# Altium PCB PCB1.PcbDoc
Units mil, origin at the board's own origin, x right, y up, seen from the top; angles counter-clockwise.
Board outline 2615 x 1935 mil, 2 copper layers (Top Layer, Bottom Layer); 43 components, 30 nets, 112 pads, 3 vias.
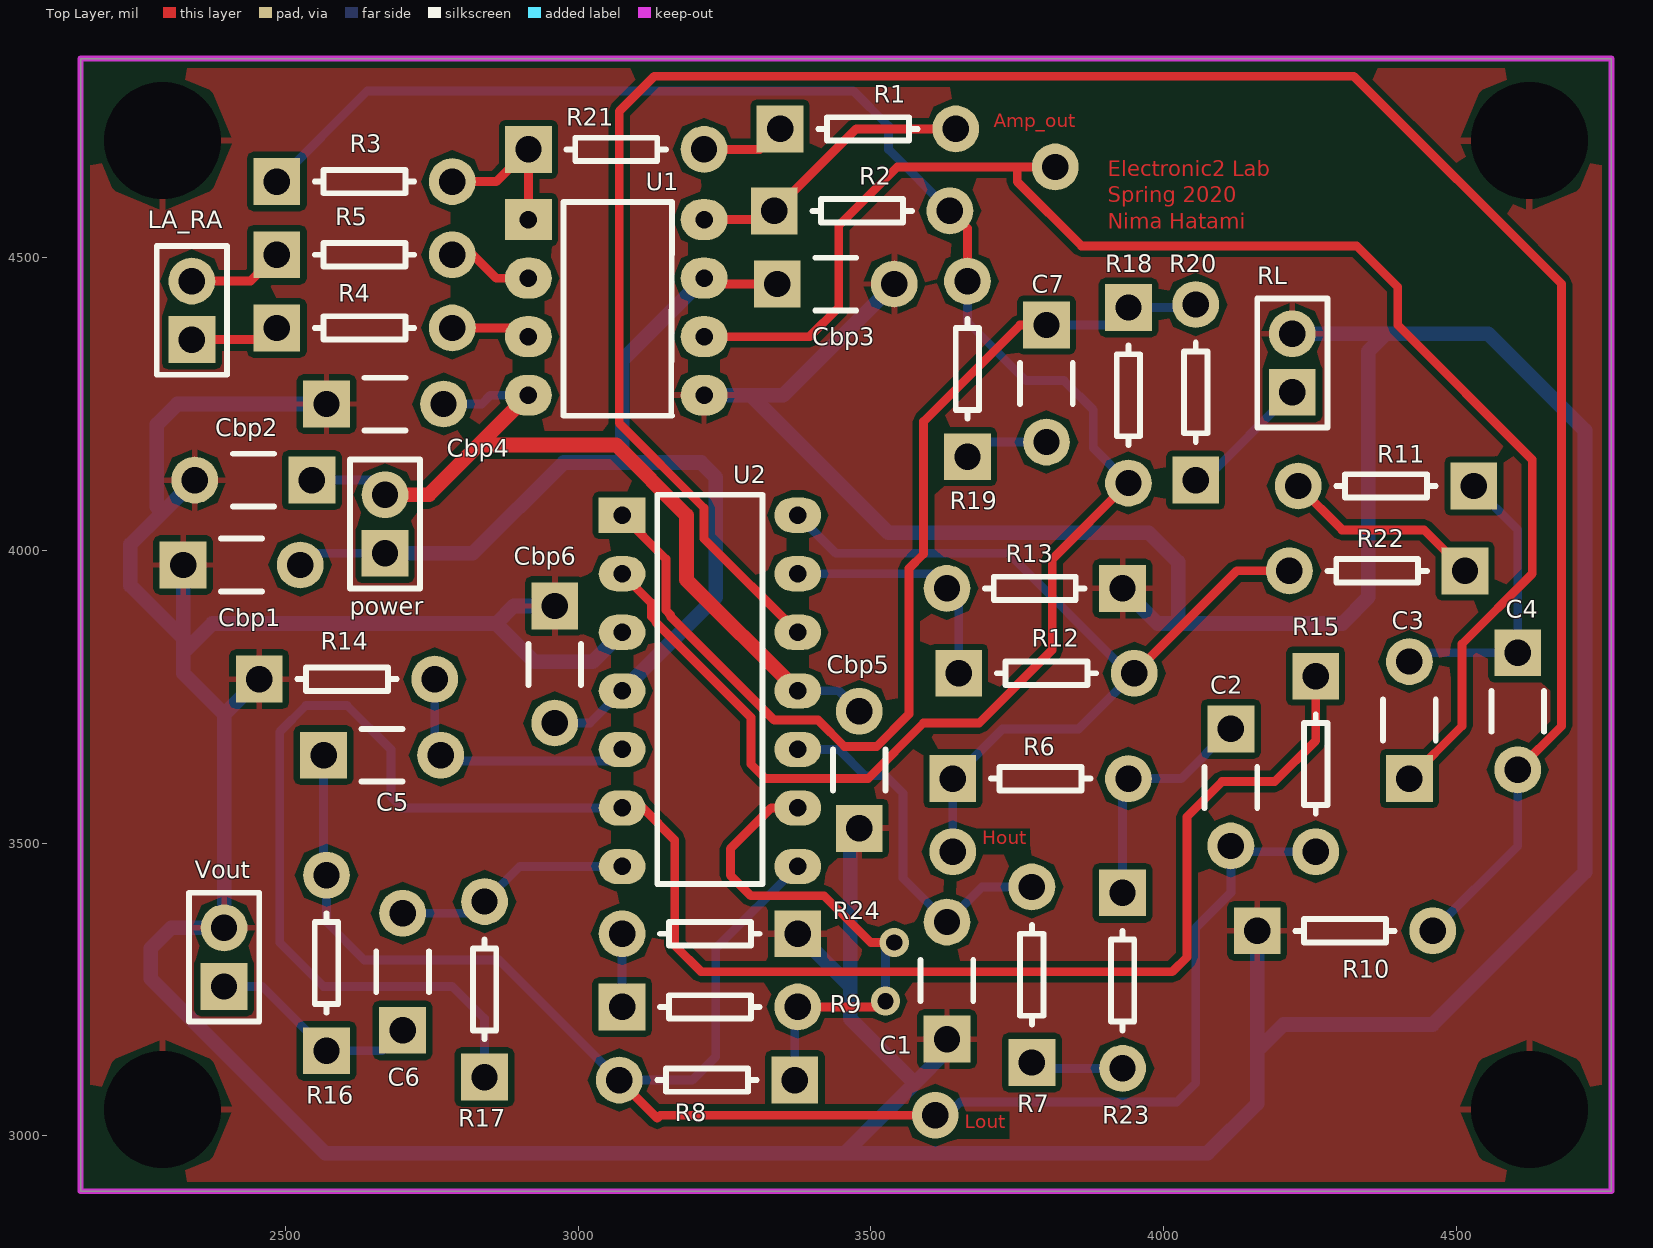
[diagram p0: Top Layer view]
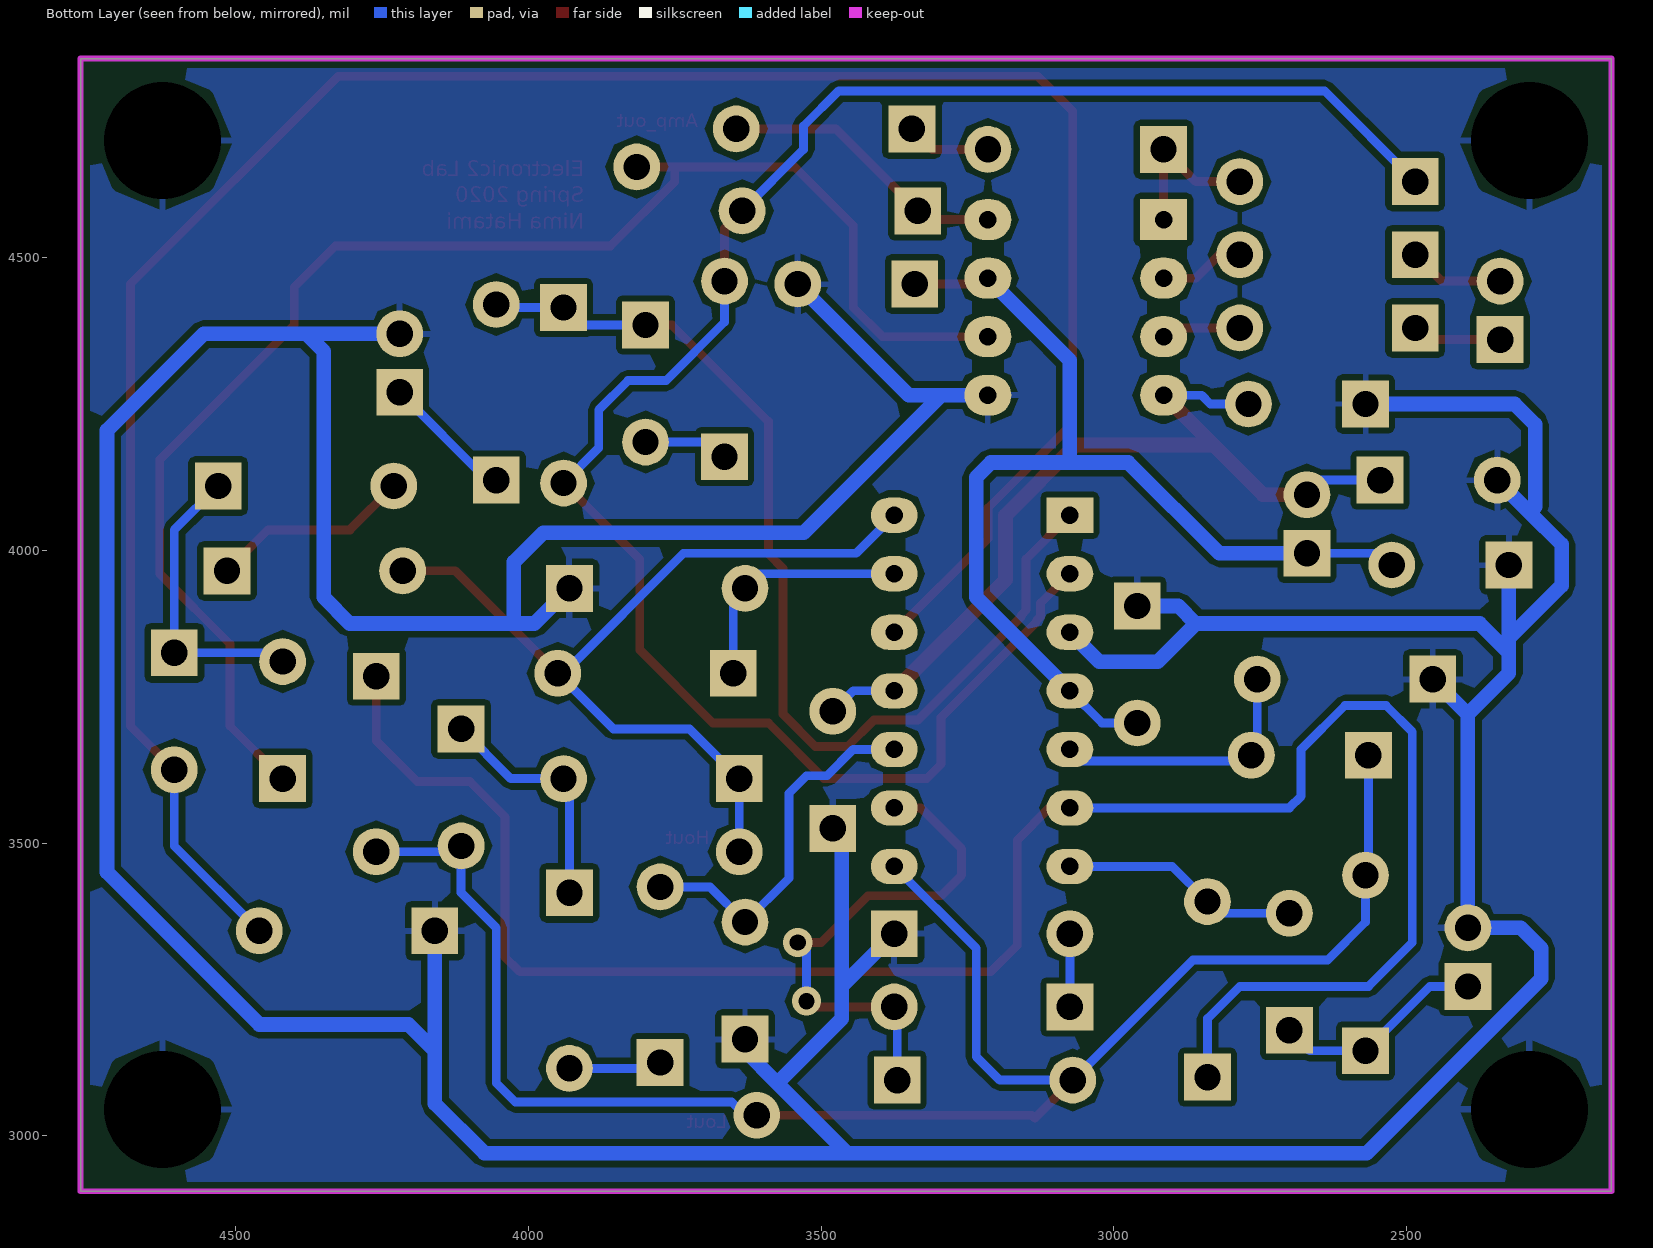
[diagram p1: Bottom Layer view, seen from below]

## Layer stack, top to bottom
Top Solder: solder mask 0.4, Solder Resist, Dk 3.5
Top Layer: signal copper 1.4
Dielectric 1: dielectric 12.6, FR-4, Dk 4.8
Bottom Layer: signal copper 1.4
Bottom Solder: solder mask 0.4, Solder Resist, Dk 3.5

## Board outline
2150,2905 2150,4840 4765,4840 4765,2905

## Design rules (kind name [scope] priority, off if disabled: settings)
Clearance [All] p1: gap=10 ignorepadtopadclearanceinfootprint=FALSE except(0: Arc-Hole Track-Hole SMDPad-Hole THPad-Hole Via-Hole Fill-Hole Poly-Hole Region-Hole Text-Hole)
HoleSize [All] p1: absolutevalues=TRUE maxlimit=250 minlimit=1 maxpercent=80.000 minpercent=20.000
PolygonConnect [All] p1: connectstyle=Relief reliefconductorwidth=10 reliefentries=4 polygonreliefangle="90 Angle" airgapwidth=10
RoutingVias [All] p1: holewidth=28 width=50 viastyle="Through Hole" minholewidth=28 minwidth=50 maxholewidth=28 maxwidth=50
SolderMaskExpansion [All] p1: expansion=4 istentingtop=FALSE
Width [All] p1: maxlimit=60 minlimit=10 preferedwidth=10
29 further rules are at their usual default settings.

## Components (designator, comment, footprint, x,y, rotation, side; value= is the part's Value field where it differs from the comment)
C1 "Cap" cap 3630,3165 r90 top value=15nF
C2 "Cap" cap 4115,3695 r270 top value=2.2uF
C3 "Cap" cap 4420,3610 r90 top value=2.2uF
C4 "Cap" cap 4605,3825 r270 top value=6.8uF
C5 "Cap" cap 2565,3650 r0 top value=47nF
C6 "Cap" cap 2700,3180 r90 top value=47nF
C7 "Cap" cap 3800,4385 r270 top value=100nF
Cbp1 "Cap" cap 2325,3975 r0 top value=10uF
Cbp2 "Cap" cap 2545,4120 r180 top value=10uF
Cbp3 "Cap" cap 3340,4455 r0 top value=100nF
Cbp4 "Cap" cap 2570,4250 r0 top value=100nF
Cbp5 "Cap" cap 3480,3525 r90 top value=100nF
Cbp6 "Cap" cap 2960,3905 r270 top value=100nF
LA_RA "port" pinheader 2340,4360 r90 top
power "port" pinheader 2670,3995 r90 top
R1 "Res Semi" res 3345,4720 r0 top value=12k
R2 "Res Semi" res 3335,4580 r0 top value=22k
R3 "Res Semi" res 2485,4630 r0 top value=22k
R4 "Res Semi" res 2485,4380 r0 top value=220k
R5 "Res Semi" res 2485,4505 r0 top value=220k
R6 "Res Semi" res 3640,3610 r0 top value=180k
R7 "Res Semi" res 3775,3125 r90 top value=220k
R8 "Res Semi" res 3370,3095 r180 top value=270k
R9 "Res Semi" res 3075,3220 r0 top value=22k
R10 "Res Semi" res 4160,3350 r0 top value=1.8Meg
R11 "Res Semi" res 4530,4110 r180 top value=4.7Meg
R12 "Res Semi" res 3650,3790 r0 top value=100k
R13 "Res Semi" res 3930,3935 r180 top value=10k
R14 "Res Semi" res 2455,3780 r0 top value=68k
R15 "Res Semi" res 4260,3785 r270 top value=10k
R16 "Res Semi" res 2570,3145 r90 top value=68k
R17 "Res Semi" res 2840,3100 r90 top value=10k
R18 "Res Semi" res 3940,4415 r270 top value=1Meg
R19 "Res Semi" res 3665,4160 r90 top value=10k
R20 "Res Semi" res 4055,4120 r90 top value=220k
R21 "Res Semi" res 2915,4685 r0 top value=2.7k
R22 "Res Semi" res 4515,3965 r180 top value=680k
R23 "Res Semi" res 3930,3415 r270 top value=10k
R24 "Res Semi" res 3375,3345 r180 top value=33
RL "port" pinheader 4220,4270 r90 top
U1 "AD620" AD620 2915,4565 r0 top
U2 "TL084" TL084 3075,4060 r0 top
Vout "port" pinheader 2395,3255 r90 top

## Footprints (in the part's own frame and the unit in brackets; to place one, negate y for a bottom-side part, rotate by r counter-clockwise, add the part's x,y. Pads: shape width x height; smd on the part's side, far side on the other; paste and mask are expansions set on the pad)
AD620 [mil]
  rect 80x70 hole 30: 1(0,0)
  oval 80x70 hole 30: 2(0,-100) 3(0,-200) 4(0,-300) 5(300,-300) 6(300,-200) 7(300,-100) 8(300,0)
  round 30 on Top Overlay: 9(90,5)
  silkscreen extent 60,-335 245,30
cap [mil]
  rect 80x80 hole 45: 1(0,0)
  round 80 hole 45: 2(200,0)
  silkscreen extent 65,-45 135,45
pinheader [mil]
  rect 80x80 hole 45: 1(0,0)
  round 80 hole 45: 2(100,0)
  silkscreen extent -60,-60 160,60
res [mil]
  rect 80x80 hole 45: 1(0,0)
  round 80 hole 45: 2(300,0)
  silkscreen extent 65,-20 235,20
TL084 [mil]
  rect 80x60 hole 30: 1(0,0)
  oval 80x60 hole 30: 2(0,-100) 3(0,-200) 4(0,-300) 5(0,-400) 6(0,-500) 7(0,-600) 8(300,-600) 9(300,-500) 10(300,-400) 11(300,-300) 12(300,-200) 13(300,-100) 14(300,0)
  round 30 on Top Overlay: 15(95,0)
  silkscreen extent 60,-630 240,35

## Part data
C1 C2 C3 C4 C5 C6 C7 Cbp1 Cbp2 Cbp3 Cbp4 Cbp5 Cbp6: "Capacitor", LatestRevisionDate=17-Jul-2002, LatestRevisionNote="Re-released for DXP Platform.", PackageDescription="Radial Cap, Thru-Hole; 2 Leads; 0.3 in Pin Spacing", PackageReference=RAD-0.3, Published=8-Jun-2000, Publisher="Altium Limited"
R1 R2 R3 R4 R5 R6 R7 R8 R9 R10 R11 R12 R13 R14 R15 R16 R17 R18 R19 R20 R21 R22 R23 R24: "Semiconductor Resistor", LatestRevisionDate=17-Jul-2002, LatestRevisionNote="Re-released for DXP Platform.", PackageDescription="Axial Device, Thru-Hole; 2 Leads; 0.5 in Pin Spacing", PackageReference=AXIAL-0.5, Published=8-Jun-2000, Publisher="Altium Limited"

## Free pads (board coordinates)
  round 80 hole 45: 5(3640,3485) 6(3815,4655)
  round 80 hole 200: 7(2290,4700) 8(2290,3045) 9(4625,3045) 10(4625,4700)

## Via types
v1: diameter 50, hole 28, Top Layer to Bottom Layer, 2 vias
v2: diameter 80, hole 45, Top Layer to Bottom Layer, 1 vias

## Nets (pads, with @x,y where several pads share a name; then routed paths per layer and width w, separated by ;. In a path a pad name is that pad's centre, name@x,y a point inside that pad or via, vN(x,y) a via of type N, cw(c..) or ccw(c..) an arc to the next point about the centre after c; other vN are vias at no path point)
Amp_out: C3.1 pad.6 U1.6 | length 2573.9
  Top Layer w15: U1.6 3395,4365 3445,4415 3445,4555 3545,4655 3750,4655 ; pad.6 3750,4655 ; C3.1 4510,3700 4510,3840 4630,3960 4630,4155 4400,4385 4400,4450 4330,4520 3860,4520 3750,4630 3750,4655
GND: C1.1 Cbp1.1 Cbp2.2 Cbp3.2 Cbp4.1 Cbp5.1 Cbp6.1 pad.7 pad.8 pad.9 pad.10 R10.1 R13.1 R14.1 R24.1 RL.2 U1.5 U2.3 Vout.2 | length 10183
  Bottom Layer w25: Cbp1.1 2325,3855 ; Cbp2.2 2290,4065 ; R14.1 2395,3720 ; Cbp4.1 2315,4250 2280,4215 2280,4075 2290,4065 ; Cbp6.1 2890,3905 2860,3875 ; U2.3 3025,3810 2925,3810 2860,3875 ; U1.5 3295,4265 ; R24.1 3465,3255 ; Cbp5.1 3465,3510 3465,3255 ; Cbp3.2 3350,4265 3295,4265 ; C1.1 3630,3145 3575,3090 ; R13.1 3990,3875 4025,3875 ; R10.1 4160,3145 ; RL.2 4380,4370 ; 2290,4065 2235,4010 2235,3940 2320,3855 2325,3855 ; 2325,3825 2325,3855 ; 2325,3825 2325,3790 2395,3720 ; 2325,3825 2375,3875 2860,3875 ; 2395,3720 Vout.2 2305,3355 2270,3320 2270,3268.18 2568.18,2970 3455,2970 ; 3295,4265 3530,4030 3975,4030 4025,3980 4025,3875 ; 3455,2970 3575,3090 ; 3455,2970 4075,2970 4160,3055 4160,3145 ; 3465,3255 3465,3200 3575,3090 ; 4025,3875 4305,3875 4350,3920 4350,4340 4380,4370 ; 4160,3145 4205,3190 4460,3190 4720,3450 4720,4205 4555,4370 4380,4370
Hout: pad.5 R6.1 R12.2 R22.2 U2.14 | length 1533.9
  Top Layer w15: R12.2 4125,3965 R22.2
  Bottom Layer w15: U2.14 3440,3995 3735,3995 3940,3790 R12.2 3855,3695 3725,3695 R6.1 pad.5
LeftA: LA_RA.1 R4.1 | length 153.3
  Top Layer w15: LA_RA.1 2465,4360 R4.1
Lout: C2.2 C5.1 R8.2 R15.2 R16.2 U2.8 | length 3079.2
  Top Layer w15: R8.2 3135,3030 3140,3035 v2(3610,3035)
  Bottom Layer w15: C5.1 2565,3450 R16.2 2570,3365 2635,3300 2865,3300 R8.2 3195,3095 3235,3135 3235,3320 U2.8 ; v2(3610,3035) 3620,3045 3640,3045 3652.5,3057.5 4022.5,3057.5 4055,3090 4055,3355 4115,3415 C2.2 4125,3485 R15.2
NetC1_2: C1.2 R7.2 U2.10 | length 632
  Bottom Layer w15: U2.10 3445,3660 3490,3615 3525,3615 3555,3585 3555,3440 C1.2 3690,3425 R7.2
NetC2_1: C2.1 R6.2 R23.1 | length 409.4
  Bottom Layer w15: R23.1 3930,3600 R6.2 4030,3610 C2.1
NetC3_2: C3.2 C4.1 R11.1 | length 507.3
  Bottom Layer w15: C3.2 4435,3825 C4.1 4605,4035 R11.1
NetC4_2: C4.2 R10.2 U2.12 | length 3994.4
  Top Layer w15: U2.12 3215,4020 3215,4072.43 3070,4217.43 3070,4750 3130,4810 4325,4810 4680,4455 4680,3700 C4.2
  Bottom Layer w15: R10.2 4605,3495 C4.2
NetC5_2: C5.2 R14.2 U2.5 | length 462.4
  Bottom Layer w15: R14.2 2755,3660 C5.2 2765,3640 3055,3640 U2.5
NetC6_2: C6.2 R17.2 U2.7 | length 408.1
  Bottom Layer w15: C6.2 2820,3380 R17.2 2900,3460 U2.7
NetC7_1: C7.1 R18.1 R20.2 U2.1 | length 1787.3
  Top Layer w15: U2.1 3150,3985 3150,3897.53 3157.5,3890.03 3157.5,3887.5 3335,3710 3410,3710 3455,3665 3510,3665 3565,3720 3565,3968.82 3590,3993.82 3590,4220 3755,4385 C7.1
  Bottom Layer w15: C7.1 3910,4385 R18.1 4050,4415 R20.2
NetC7_2: C7.2 R19.1 | length 145.4
  Bottom Layer w15: R19.1 3690,4185 C7.2
NetR1_1: R1.1 R21.2 | length 144.5
  Top Layer w15: R21.2 3310,4685 R1.1
NetR1_2: R1.2 R2.1 U1.8 | length 494.2
  Top Layer w15: U1.8 3320,4565 R2.1 3475,4720 R1.2
NetR2_2: R2.2 R3.1 R18.2 R19.2 U2.2 | length 3323.4
  Top Layer w15: U2.2 3125,3910 3125,3887.18 3132.5,3879.68 3132.5,3877.14 3295,3714.64 3295,3635 3320,3610 3495,3610 3590,3705 3685,3705 3810,3830 3810,3985 R18.2 ; R2.2 3665,4550 R19.2
  Bottom Layer w15: R3.1 2640,4785 3470,4785 3530,4725 3530,4685 R2.2 ; R19.2 3665,4390 3765,4290 3830,4290 3880,4240 3880,4175 R18.2
NetR3_2: R3.2 R21.1 U1.1 | length 272.8
  Top Layer w15: R3.2 2860,4630 R21.1 U1.1
NetR4_2: R4.2 U1.3 | length 136.2
  Top Layer w15: R4.2 2900,4380 U1.3
NetR5_2: R5.2 U1.2 | length 146.6
  Top Layer w15: R5.2 2820,4505 2860,4465 U1.2
NetR7_1: R7.1 R23.2 | length 159.1
  Bottom Layer w15: R7.1 3785,3115 R23.2
NetR8_1: R8.1 R9.2 U2.9 | length 907.6
  Top Layer w15: U2.9 3330,3560 3260,3490 3260,3445 3295,3410 3420,3410 3500,3330 v1(3540,3330) ; R9.2@3377.5,3222.5 R9.2 3515,3220 v1(3525,3230)
  Bottom Layer w15: R8.1 3370,3215 R9.2 ; v1(3525,3230) 3525,3315 v1(3540,3330)
NetR9_1: R9.1 R24.2 | length 125
  Bottom Layer w15: R9.1 R24.2
NetR11_2: R11.2 R22.1 | length 345.1
  Top Layer w15: R11.2 4305,4035 4445,4035 R22.1
NetR12_1: R12.1 R13.2 U2.13 | length 418.6
  Bottom Layer w15: U2.13 3605,3960 R13.2 3650,3915 R12.1
NetR15_1: R15.1 R17.1 U2.6 | length 3407.5
  Top Layer w15: U2.6 3110,3560 3165,3505 3165,3325 3210,3280 4015,3280 4040,3305 4040,3545 4100,3605 4190,3605 4260,3675 R15.1
  Bottom Layer w15: R17.1 2840,3200 2785,3255 2565,3255 2490,3330 2490,3690 2535,3735 2605,3735 2680,3660 2680,3580 2700,3560 U2.6
Nout: C6.1 R16.1 Vout.1 | length 365.1
  Bottom Layer w15: Vout.1 2460,3255 R16.1 2665,3145 C6.1
RightA: LA_RA.2 R5.1 | length 163.6
  Top Layer w15: LA_RA.2 2440,4460 R5.1
RightL: R20.1 RL.1 | length 227.1
  Bottom Layer w15: R20.1 4070,4120 RL.1
VCC: Cbp1.2 Cbp3.1 Cbp6.2 power.1 U1.7 U2.4 | length 1864
  Top Layer w15: U1.7 3225,4455 Cbp3.1
  Bottom Layer w15: Cbp1.2 2545,3995 power.1 ; Cbp6.2 3020,3705 U2.4
  Bottom Layer w25: power.1 2820,3995 2975,4150 3075,4150 ; U2.4 3235,3920 3235,4125 3210,4150 3075,4150 ; U1.7 3075,4325 3075,4150
VEE: Cbp2.1 Cbp4.2 Cbp5.2 power.2 U1.4 U2.11 | length 1504.9
  Top Layer w25: power.2 2745,4095 2830,4180 ; U1.4 2830,4180 ; U2.11 3185,3950 3185,4060 3065,4180 2830,4180
  Bottom Layer w15: Cbp2.1 2645,4120 power.2 ; Cbp4.2 2835,4250 2850,4265 U1.4 ; U2.11 3445,3760 Cbp5.2
pads on no net: U1.9 U2.15

## Polygon pours and split planes (outlines as drawn)
GND on Top Layer "Top Layer-GND" (solid, remove dead copper, pour order 6): 2150,4840 4765,4840 4765,2905 2150,2905
GND on Bottom Layer "Bottom Layer-GND" (solid, remove dead copper, pour order 8): 2150,4840 4765,4840 4765,2905 2150,2905

## Keep-outs
Keep-Out Layer:
  the board outline again, w10

## Other copper
Top Layer:
  text "Amp_out" at 3710,4715 h40
  text "Electronic2 Lab / Spring 2020 / Nima Hatami" at 3905,4540 h45
  text "Hout" at 3690,3490 h40
  text "Lout" at 3660,3005 h40